# Altium PCB PCB1-v2.PcbDoc
Units mm, origin at the board's own origin, x right, y up, seen from the top; angles counter-clockwise.
Board outline 24 x 17 mm, 2 copper layers (Top Layer, Bottom Layer); 14 components, 11 nets, 43 pads, 10 vias.
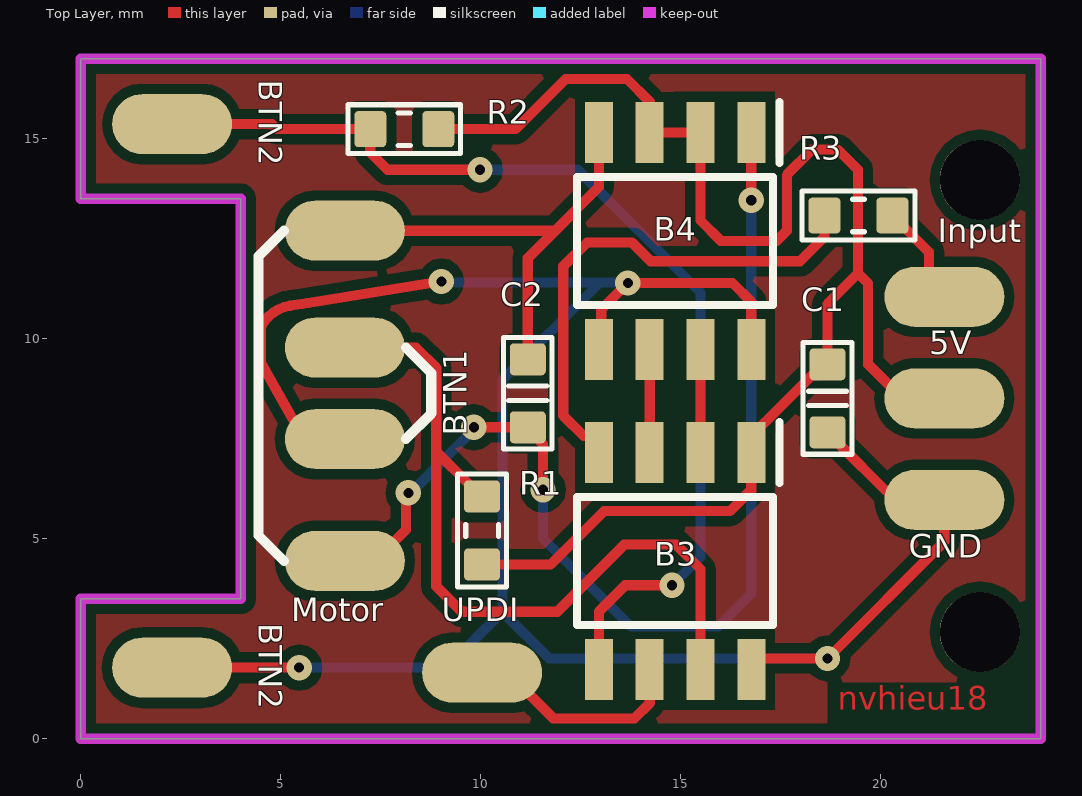
[diagram p0: Top Layer view]
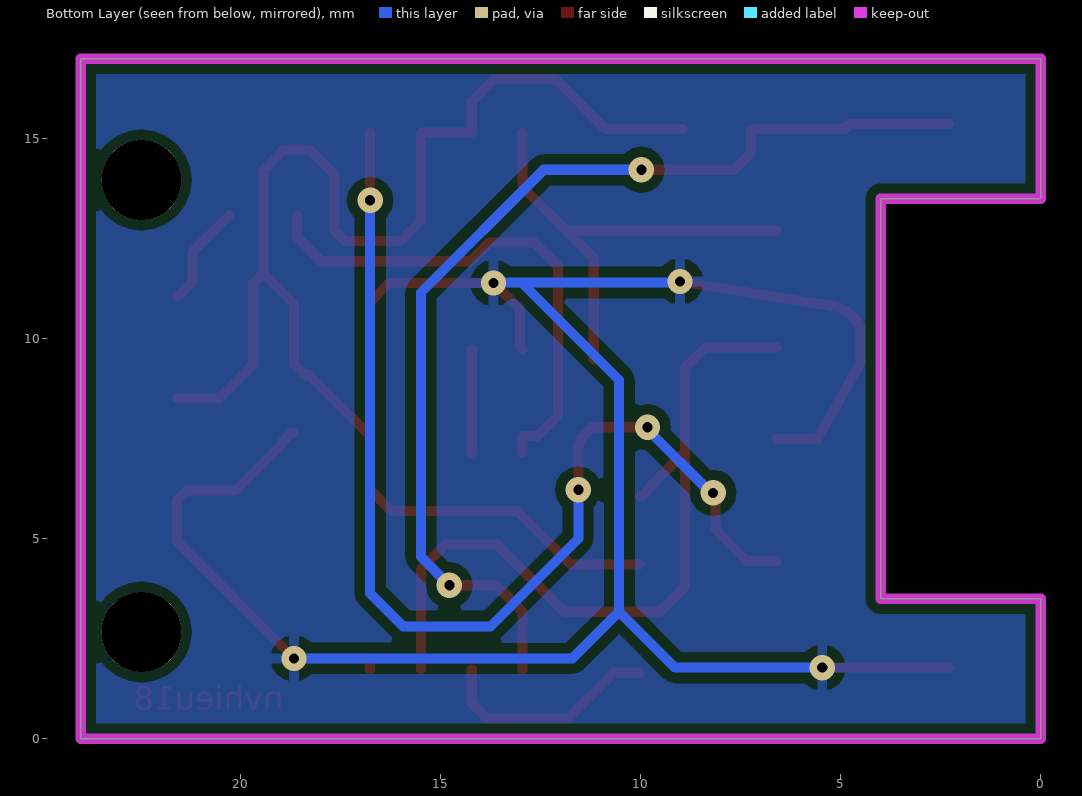
[diagram p1: Bottom Layer view, seen from below]
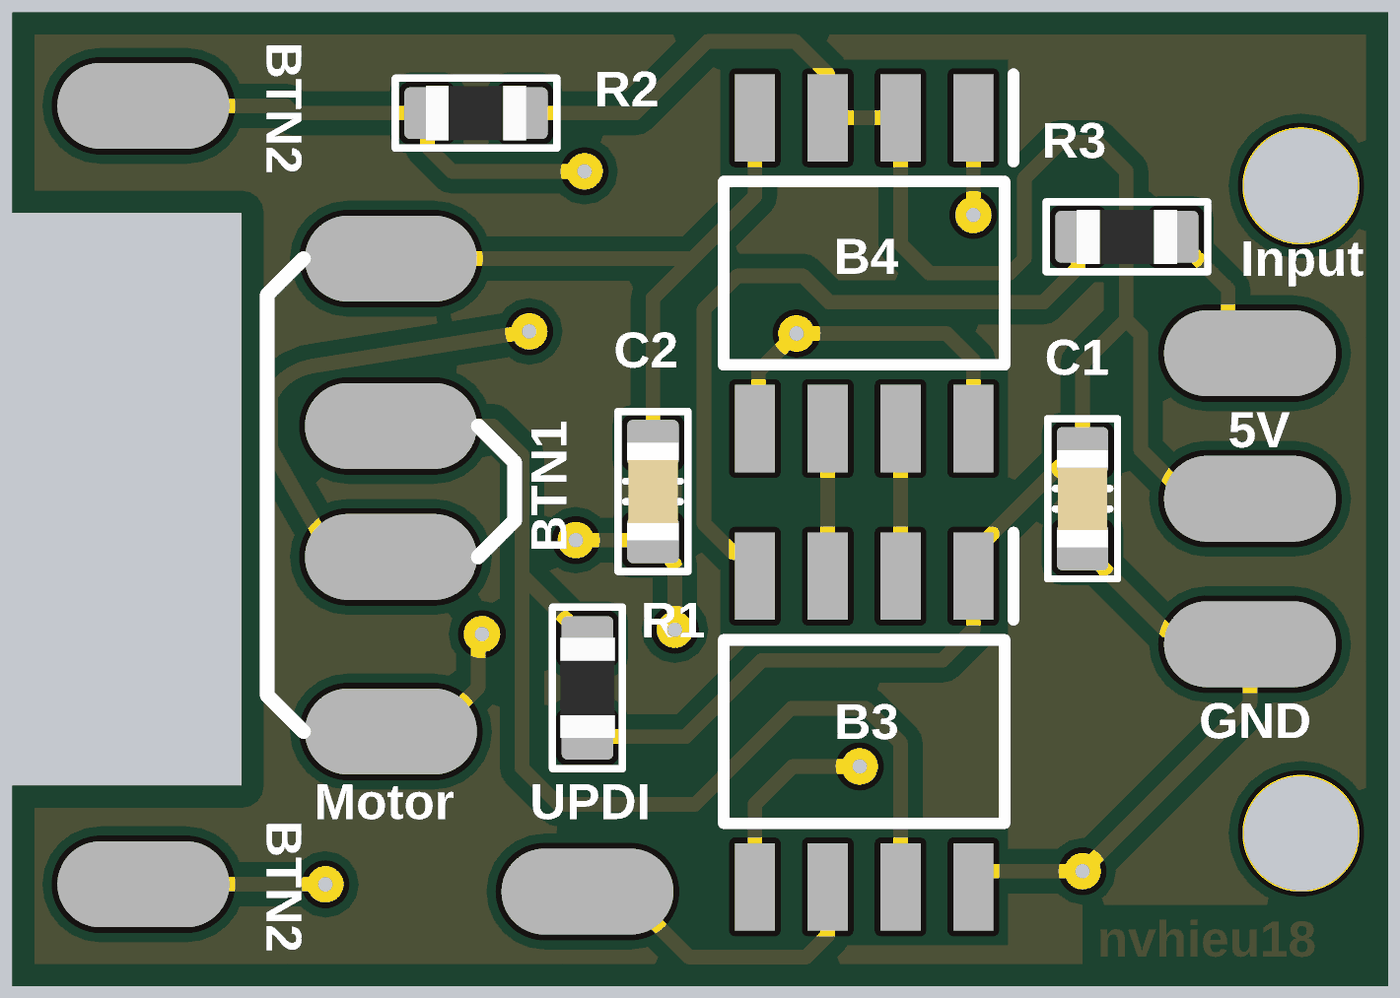
[diagram p2: 3D render of the assembled board from above, using the file's embedded part models]

## Layer stack, top to bottom
Top Solder: solder mask 0.0102, Solder Resist, Dk 3.5
Top Layer: signal copper 0.0356
Dielectric 1: dielectric 0.32, FR-4, Dk 4.8
Bottom Layer: signal copper 0.0356
Bottom Solder: solder mask 0.0102, Solder Resist, Dk 3.5

## Board outline
0,0 0,3.5 4,3.5 4,13.5 0,13.5 0,17 24,17 24,0

## Design rules (kind name [scope] priority, off if disabled: settings)
Clearance [All] p1: gap=0.254 ignorepadtopadclearanceinfootprint=FALSE except(0: Arc-Hole Track-Hole SMDPad-Hole THPad-Hole Via-Hole Fill-Hole Poly-Hole Region-Hole Text-Hole)
PolygonConnect [All] p1: connectstyle=Relief reliefconductorwidth=0.254 reliefentries=4 polygonreliefangle="90 Angle" airgapwidth=0.254
RoutingVias [All] p1: holewidth=0.254 width=0.635 viastyle="Through Hole" minholewidth=0.254 minwidth=0.635 maxholewidth=0.508 maxwidth=1.143
SolderMaskExpansion [All] p1: expansion=0.102 istentingtop=FALSE
Width [All] p1: maxlimit=0.254 minlimit=0.254 preferedwidth=0.254
30 further rules are at their usual default settings.

## Classes and differential pairs
component class sche: B3 B4 BTN2 C1 C2 Input MOTOR R1 R2 R3 UPDI

## Components (designator, comment, footprint, x,y, rotation, side; value= is the part's Value field where it differs from the comment)
B3 "ATTINY202-SSNR" SOIC127P600X175-8N 14.859,4.445 r270 top
B4 "L9110S" SOIC127P600X175-8N 14.859,12.446 r270 top
BTN1 "Pad_1" Pad_1 6.604,9.779 r90 top (schematic designator P1)
BTN2 "Pad_1" Pad_1 2.286,1.778 r90 top (schematic designator P4)
BTN2 "Pad_1" Pad_1 2.286,15.367 r90 top (schematic designator P3)
C1 "104" "CAP 0603" 18.669,8.509 r90 top
C2 "104" "CAP 0603" 11.176,8.636 r270 top
Input "Pad_3" Pad_3_2.54 21.59,8.509 r270 top
Motor "Pad_2" PAD_2_2.54 -0.889,9.525 r90 top
P2 "Pad_1" Pad_1 6.604,7.493 r90 top
R1 "1K" "RES 0603" 10.033,5.219 r270 top
R2 "1K" "RES 0603" 8.077,15.24 r0 top
R3 "4.7k" "RES 0603" 19.431,13.081 r0 top
UPDI "TEST" TEST 10.033,1.651 r180 top

## Footprints (in the part's own frame and the unit in brackets; to place one, negate y for a bottom-side part, rotate by r counter-clockwise, add the part's x,y. Pads: shape width x height; smd on the part's side, far side on the other; paste and mask are expansions set on the pad)
"CAP 0603" [mm]
  round 0.254 on Mech15: 0(0,0)
  rrect25% 0.8x0.9 smd: 1(0.85,0) 2(-0.85,0)
  silkscreen extent -1.4,-0.61 1.4,0.61, body extent -0.85,-0.45 0.85,0.45, height 0.89
Pad_1 [mm]
  oval 1.5x3 smd: 1(0,0)
PAD_2_2.54 [mm]
  oval 1.5x3 smd: 1(-5.08,-7.493) 2(3.175,-7.493)
Pad_3_2.54 [mm]
  oval 1.5x3 smd: 1(-2.54,0) 2(0,0) 3(2.54,0)
"RES 0603" [mm]
  round 0.254 on Mech15: 0(0.012,0)
  rrect25% 0.8x0.9 smd: 1(0.862,0) 2(-0.838,0)
  silkscreen extent -1.4,-0.61 1.42,0.61, body extent -0.86,-0.47 0.89,0.48, height 0.54
SOIC127P600X175-8N [mm]
  rect 1.525x0.7 smd: 1(-2.712,1.905) 2(-2.712,0.635) 3(-2.712,-0.635) 4(-2.712,-1.905) 5(2.712,-1.905) 6(2.712,-0.635) 7(2.712,0.635) 8(2.712,1.905)
  silkscreen extent -3.48,-2.45 1.6,2.61
TEST [mm]
  oval 3x1.5 smd: 1(0,0)

## Part data
B3: "8-bit Microcontrollers - MCU 20MHz, 2KB, SOIC8, Ind 105C, Green, T&R", Manufacturer_Name=Microchip, Mouser Part Number=579-ATTINY202-SSNR, Arrow Part Number=ATTINY202-SSNR, Arrow Price/Stock=https://www.arrow.com/en/products/attiny202-ssnr/microchip-technology?utm_currency=USD&region=nac, Datasheet Link=http://ww1.microchip.com/downloads/en/DeviceDoc/ATtiny202-402-AVR-MCU-with-Core-Independent-Peripherals_and-picoPower-40001969A.pdf, Geometry.Height=1.75mm, Manufacturer_Part_Number=ATTINY202-SSNR, Mouser Price/Stock=https://www.mouser.co.uk/ProductDetail/Microchip-Technology/ATTINY202-SSNR?qs=y6ZabgHbY%252Bx90fzudZ0SuA%3D%3D
B4: "Motor Drivers SOP-8_150mil RoHS", Manufacturer_Name="Wuxi I-core Elec", Datasheet Link=https://datasheet.lcsc.com/szlcsc/Wuxi-Zhongwei-Aisin-Elec-L9110S_C85174.pdf, Geometry.Height=1.75mm, Manufacturer_Part_Number=L9110S
C1 C2: library part CAP
R1 R2 R3: library part RES
UPDI: library part Test_Point

## Free pads (board coordinates)
  round 2 hole 2: ""(22.479,2.667) ""(22.479,13.97)

## Via types
v1: diameter 0.635, hole 0.254, Top Layer to Bottom Layer, 10 vias

## Nets (pads, with @x,y where several pads share a name; then routed paths per layer and width w, separated by ;. In a path a pad name is that pad's centre, name@x,y a point inside that pad or via, vN(x,y) a via of type N, cw(c..) or ccw(c..) an arc to the next point about the centre after c; other vN are vias at no path point)
5V: B3.1 B4.2 B4.3 C1.1 Input.2 R1.1 R2.1 | length 37.7
  Top Layer w0.254: R2.1 10.871,15.24 12.123,16.492 13.658,16.492 14.224,15.926 B4.3 B4.2 15.494,12.954 16.002,12.446 17.399,12.446 17.653,12.7 17.653,14.097 18.288,14.732 18.923,14.732 19.431,14.224 19.431,11.633 ; R1.1 11.748,4.357 13.081,5.69 16.231,5.69 16.764,6.223 16.764,7.57 16.987,7.793 16.989,7.793 18.283,9.086 18.396,9.086 C1.1 18.669,10.871 19.431,11.633 ; Input.2 20.535,8.509 19.685,9.359 19.685,11.379 19.431,11.633
BTN1: B3.7 BTN1.1 R1.2 | length 19.9
  Top Layer w0.254: BTN1.1 8.382,9.779 8.89,9.271 8.89,7.175 ; R1.2 9.983,6.057 9.71,6.33 9.71,6.355 8.89,7.175 ; B3.7 15.494,4.242 14.884,4.851 13.589,4.851 11.913,3.175 9.525,3.175 8.89,3.81 8.89,7.175
BTN2: B3.5 BTN2.1@2.286,15.367 R2.2 | length 26.5
  Top Layer w0.254: BTN2.1@2.286,15.367 4.775,15.367 4.902,15.24 R2.2 7.239,14.654 7.669,14.224 v1(9.982,14.224) ; B3.5 12.954,3.175 13.614,3.835 v1(14.783,3.835)
  Bottom Layer w0.254: v1(9.982,14.224) 12.427,14.224 15.494,11.157 15.494,4.547 v1(14.783,3.835)
GND: B3.8 B4.5 B4.8 BTN2.1@2.286,1.778 C1.2 Input.3 P2.1 | length 57.6
  Top Layer w0.254: BTN2.1@2.286,1.778 v1(5.461,1.778) ; 5.679,10.896 ccw(c5.854,9.779) 5.672,10.895 5.526,10.872 5.232,10.825 ccw(c5.388,9.845) 4.508,10.303 4.508,9.388 ccw(c5.388,9.845) 4.528,9.352 4.53,9.348 4.541,9.328 5.586,7.493 P2.1 ; 5.679,10.896 8.763,11.389 v1(9.017,11.43) ; B4.5 13.015,9.795 13.015,10.729 v1(13.68,11.394) 16.292,11.394 16.764,10.922 B4.8 ; B3.8 16.764,2.007 v1(18.669,2.007) 21.59,4.928 Input.3 21.352,6.207 20.121,6.207 18.992,7.336 18.992,7.386 18.719,7.659 C1.2
  Bottom Layer w0.254: v1(5.461,1.778) 9.144,1.778 10.541,3.175 ; v1(9.017,11.43) 9.042,11.405 13.669,11.405 v1(13.68,11.394) ; 12.968,11.394 10.541,8.966 10.541,3.175 ; v1(18.669,2.007) 11.709,2.007 10.541,3.175
IN1: B3.2 B4.7 | length 2.6
  Top Layer w0.254: B3.2 B4.7
IN2: B3.3 B4.6 | length 2.6
  Top Layer w0.254: B3.3 B4.6
NetB3_4: B3.4 R3.2 | length 13
  Top Layer w0.254: B3.4 12.954,7.569 12.573,7.569 12.065,8.077 12.065,11.811 12.655,12.402 13.786,12.402 14.249,11.938 17.983,11.938 18.593,12.548 R3.2
NetB3_6: B3.6 UPDI.1 | length 5.7
  Top Layer w0.254: UPDI.1 10.668,1.651 11.811,0.508 13.843,0.508 14.224,0.889 B3.6
NetB4_1: B4.1 C2.1 Motor.1 | length 27.4
  Top Layer w0.254: Motor.1 7.354,4.445 8.128,5.219 8.128,6.082 v1(8.191,6.145) ; v1(9.83,7.786) 11.226,7.786 11.499,7.513 11.499,7.422 11.557,7.364 v1(11.557,6.223) ; v1(16.764,13.462) B4.1
  Bottom Layer w0.254: v1(8.191,6.145) 8.247,6.145 9.83,7.728 v1(9.83,7.786) ; v1(11.557,6.223) 11.557,5.005 13.755,2.807 15.939,2.807 16.764,3.632 v1(16.764,13.462)
NetB4_4: B4.4 C2.2 Motor.2 | length 11.7
  Top Layer w0.254: Motor.2 11.862,12.7 ; C2.2 11.176,12.014 11.862,12.7 ; B4.4 12.954,13.792 11.862,12.7
Pulse_Input: Input.1 R3.1 | length 2.6
  Top Layer w0.254: R3.1 21.209,12.165 21.209,11.43 Input.1
pads on no net: C1.0 C2.0 R1.0 R2.0 R3.0

## Polygon pours and split planes (outlines as drawn)
no net on Top Layer "NONET_L01_P000" (solid, pour order 0): 0,0 0,3.5 4,3.5 4,13.5 0,13.5 0,17 24,17 24,0
GND on Bottom Layer "GND_L02_P001" (solid, pour order 1): 0,0 0,3.5 4,3.5 4,13.5 0,13.5 0,17 24,17 24,0

## Keep-outs
Keep-Out Layer:
  lines w0.254: 0,2 0,2.667 ; 0,0 0,3.5 4,3.5 4,13.5 0,13.5 0,17 24,17 24,0 0,0

## Other copper
Top Layer:
  text "nvhieu18" at 18.923,0.52 h1

## Silkscreen, mask and mechanical layers (free items; w line width, h text height)
Top Overlay:
  lines w0.254: 5.08,4.445 4.445,5.08 4.445,12.065 5.08,12.7 ; 8.128,7.493 8.763,8.128 8.763,9.144 8.128,9.779
  text "5V" at 21.209,9.41 h1
  text "GND" at 20.701,4.33 h1